# Altium PCB Power Board V2.PcbDoc
Units mil, origin at the board's own origin, x right, y up, seen from the top; angles counter-clockwise.
Board outline 2750 x 3800 mil, 2 copper layers (Top Layer, Bottom Layer); 56 components, 33 nets, 225 pads, 0 vias.
Unrouted connection lines stored in the file: 155.
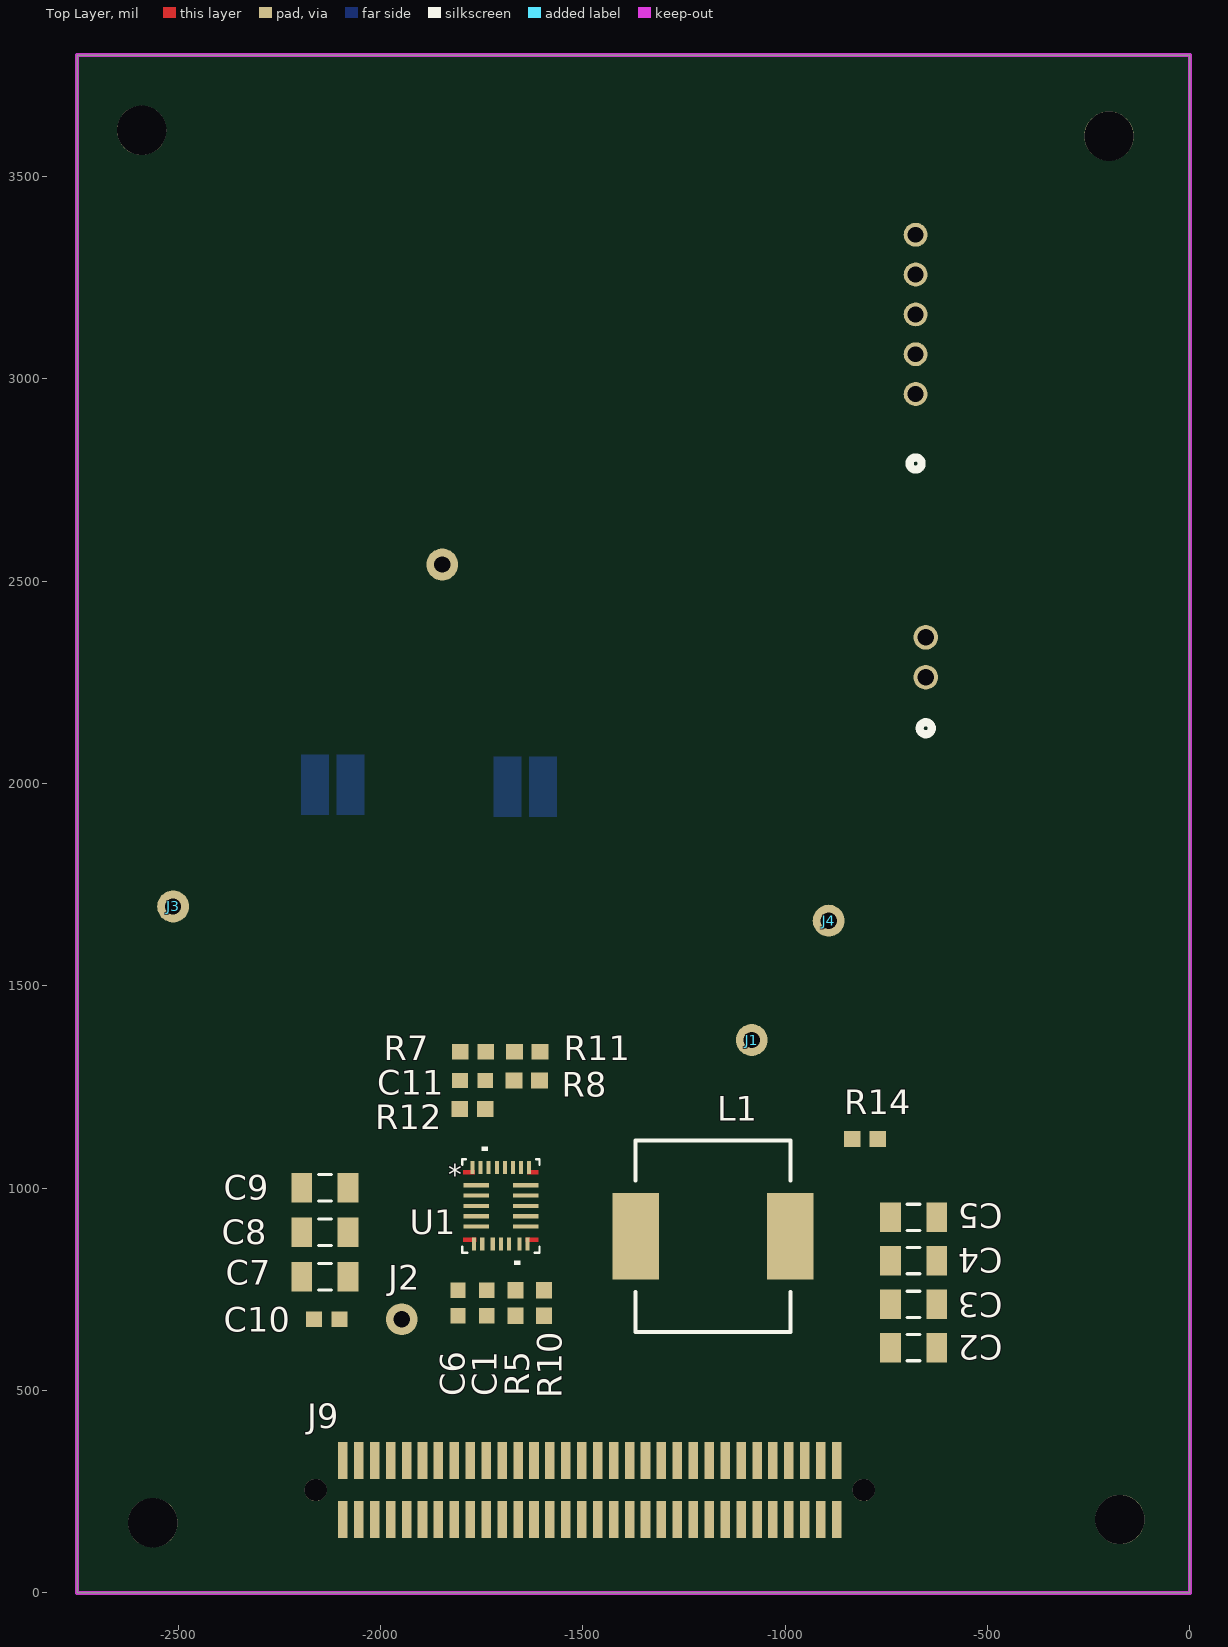
[diagram p0: Top Layer view]
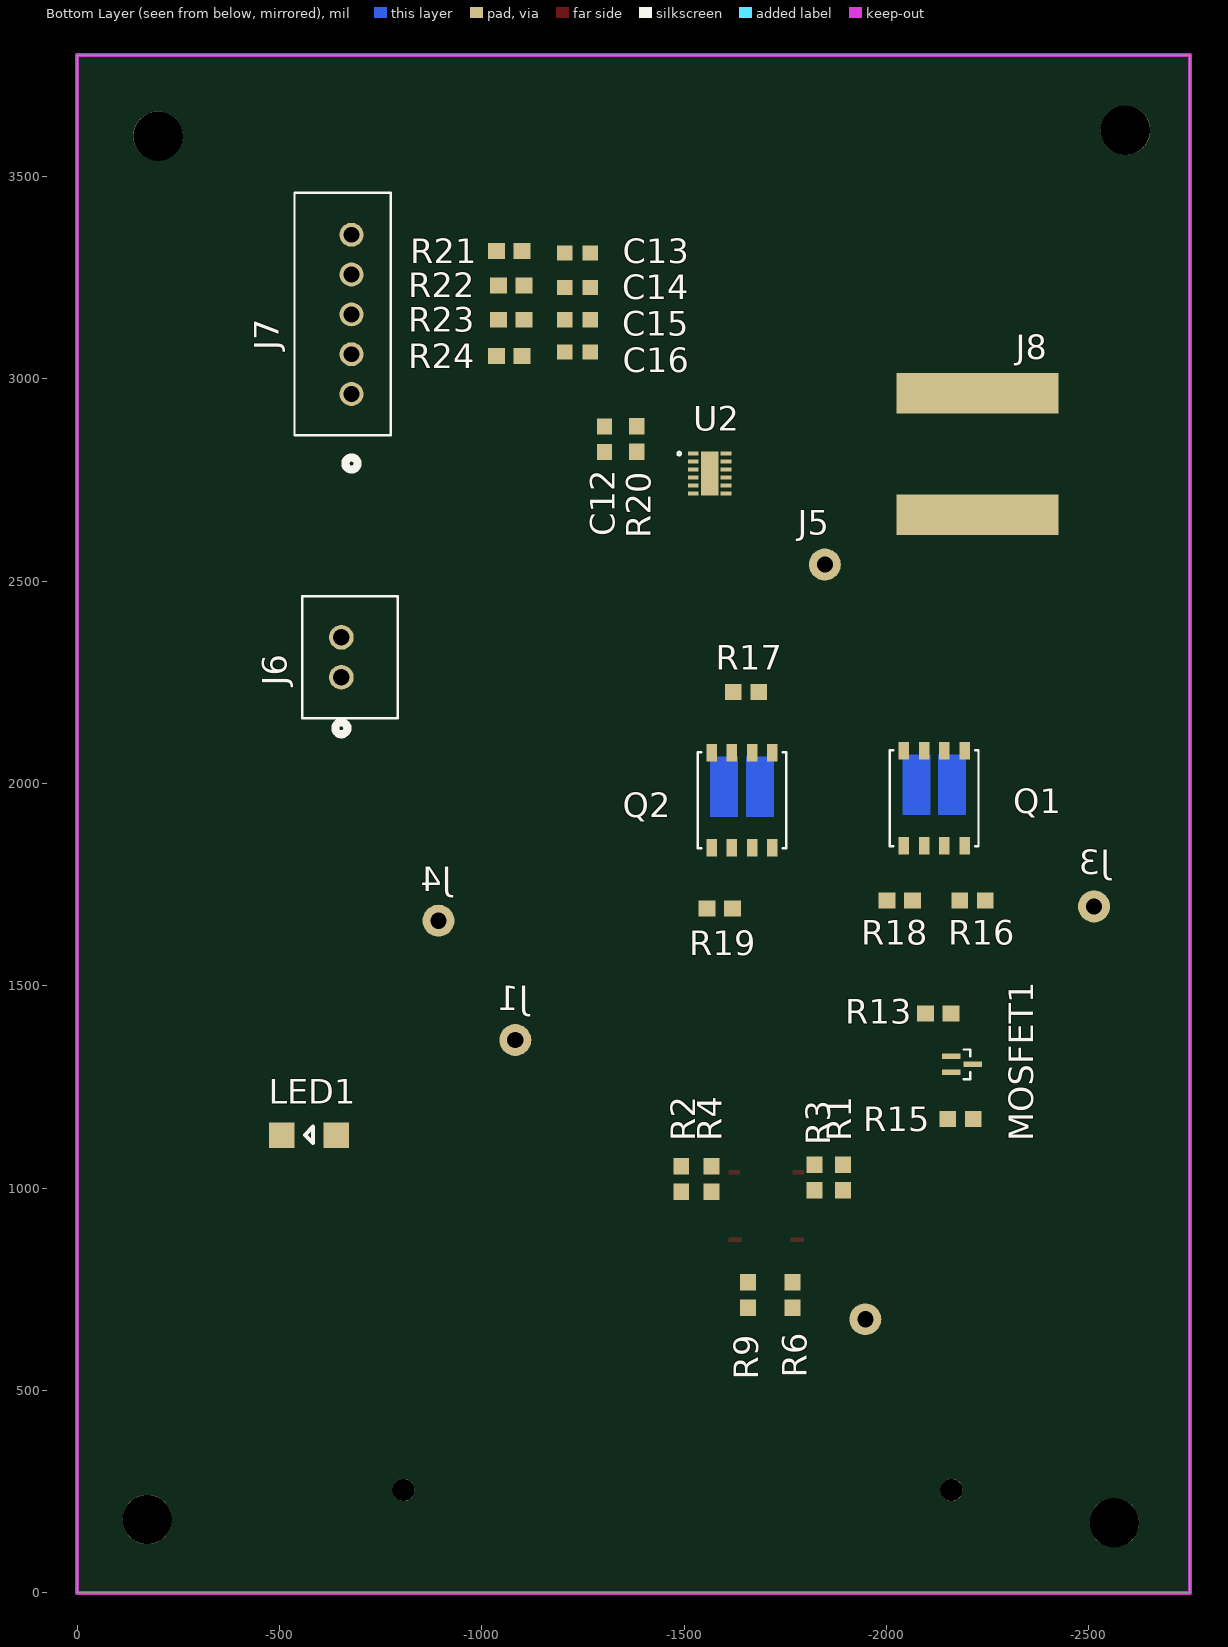
[diagram p1: Bottom Layer view, seen from below]

## Layer stack, top to bottom
Top Solder: solder mask 0.4, Solder Resist, Dk 3.5
Top Layer: signal copper 1.4
Dielectric 1: dielectric 12.6, FR-4, Dk 4.8
Bottom Layer: signal copper 1.4
Bottom Solder: solder mask 0.4, Solder Resist, Dk 3.5

## Board outline
-2750.02,-0.01 -2750.02,3799.99 -0.02,3799.99 -0.02,-0.01

## Design rules (kind name [scope] priority, off if disabled: settings)
Clearance [All] p1: gap=10 ignorepadtopadclearanceinfootprint=FALSE except(0: Arc-Hole Track-Hole SMDPad-Hole THPad-Hole Via-Hole Fill-Hole Poly-Hole Region-Hole Text-Hole)
PolygonConnect [All] p1: connectstyle=Relief reliefconductorwidth=10 reliefentries=4 polygonreliefangle="90 Angle" airgapwidth=10
RoutingVias [All] p1: holewidth=28 width=50 viastyle="Through Hole" minholewidth=28 minwidth=50 maxholewidth=28 maxwidth=50
SolderMaskExpansion [All] p1: expansion=4 istentingtop=FALSE
Width [All] p1: maxlimit=10 minlimit=10 preferedwidth=10
30 further rules are at their usual default settings.

## Classes and differential pairs
component class "Board Connector": J8 J9
component class "Buck Converter": C1 C2 C3 C4 C5 C6 C7 C8 C9 C10 C11 J1 J2 L1 LED1 MOSFET1 R1 R2 R3 R4 R5 R6 R7 R8 R9 R10 R11 R12 R13 R14 R15 U1
component class "Battery Management System": "  " C12 C13 C14 C15 C16 J3 J4 J5 J6 J7 Q1 Q2 R16 R17 R18 R19 R20 R21 R22 R23 R24 U2

## Components (designator, comment, footprint, x,y, rotation, side; value= is the part's Value field where it differs from the comment)
C1 "Cap" CAPC0603 -1737.96,716.2 r90 top value=0.22uF
C2 "Cap" CAPC1206 -682.96,606.2 r0 top value=33uF
C3 "Cap" CAPC1206 -682.96,712.66 r0 top value=33uF
C4 "Cap" CAPC1206 -682.96,821.2 r0 top value=NS
C5 "Cap" CAPC1206 -682.96,927.66 r0 top value=NS
C6 "Cap" CAPC0603 -1808.99,716.2 r270 top value=1uF
C7 "Cap" CAPC1206 -2137.96,781.2 r180 top value=22uF
C8 "Cap" CAPC1206 -2137.96,891.2 r180 top value=4.7uF
C9 "Cap" CAPC1206 -2137.96,1001.2 r180 top value=NS
C10 "Cap" CAPC0603 -2132.96,676.2 r180 top value=100nF
C11 "Cap" CAPC0603 -1772.96,1266.2 r0 top value=NS
C12 "Cap" CAPC0603 -1302.96,2851.2 r90 bottom value=100nF
C13 "Cap" CAPC0603 -1236.46,3311.2 r180 bottom value=100nF
C14 "Cap" CAPC0603 -1236.46,3226.2 r0 bottom value=100nF
C15 "Cap" CAPC0603 -1236.46,3146.2 r180 bottom value=100nF
C16 "Cap" CAPC0603 -1236.46,3066.2 r0 bottom value=100nF
J1 "5000 Test Point" "5000 Test Point" -1082.96,1366.2 r0 top
J2 "5000 Test Point" "5000 Test Point" -1947.96,676.2 r0 top
J3 "5000 Test Point" "5000 Test Point" -2512.96,1696.2 r0 top
J4 "5000 Test Point" "5000 Test Point" -892.96,1661.2 r0 top
J5 "5000 Test Point" "5000 Test Point" -1847.96,2541.2 r180 bottom
J6 "B2B-XH-A(LF)(SN)" CONN_B2B-XH-A(LF)(SN)_JST -652.96,2262.77 r270 bottom
J7 "B5B-XH-A(LF)(SN)" CONN_B5B-XH-A(LF)(SN)_JST -677.96,2962.49 r90 bottom
J8 "Surface Mount Pad to solder battery connector wires from power bus bar" "Battery Connector" -2207.96,2676.2 r0 bottom
J9 "0714392464" "1.0mm mezzanine connector 64 pin" -2093.51,326.86 r0 top
L1 "SRR1280A-6R8Y" "SRR1208 Series" -1369.85,881.2 r90 top
LED1 "LED" LED1206 -572.96,1131.2 r0 bottom
MOSFET1 "SSM3K56FS,LF" SSM_TOS -2186.38,1306.2 r270 bottom
Q1 "TSM6502CR RLG" PDFN56U_DUAL_TWS -2117.96,1963.7 r90 bottom
Q2 "TSM6502CR RLG" PDFN56U_DUAL_TWS -1642.96,1958.7 r90 bottom
R1 "Res" RES0603 -1892.96,1026.2 r90 bottom value=0
R2 "Res" RES0603 -1492.96,1022.69 r90 bottom value=NS
R3 "Res" RES0603 -1821.92,1026.2 r90 bottom value=NS
R4 "Res" RES0603 -1567.96,1022.69 r90 bottom value=0
R5 "Res" RES0603 -1666.92,716.2 r270 top value=0
R6 "Res" RES0603 -1767.96,736.2 r90 bottom value=NS
R7 "Res" RES0603 -1771.98,1337.23 r0 top value=0
R8 "Res" RES0603 -1638.93,1266.2 r0 top value=NS
R9 "Res" RES0603 -1657.96,736.2 r270 bottom value=NS
R10 "Res" RES0603 -1595.89,716.2 r90 top value=54.9k
R11 "Res" RES0603 -1637.96,1337.23 r0 top value=174k
R12 "Res" RES0603 -1772.96,1195.16 r0 top value=43.2k
R13 "Res" RES0603 -2127.96,1431.2 r180 bottom value=3k
R14 "Res" RES0603 -802.96,1121.2 r0 top value=1k
R15 "Res" RES0603 -2182.96,1171.2 r180 bottom value=NS
R16 "Res" RES0603 -2212.96,1711.2 r0 bottom value=1k
R17 "Res" RES0603 -1652.96,2226.2 r180 bottom value=1k
R18 "Res" RES0603 -2032.96,1711.2 r180 bottom value=1k
R19 "Res" RES0603 -1587.96,1691.2 r180 bottom value=1k
R20 "Res" RES0603 -1382.96,2851.2 r270 bottom value=300
R21 "Res" RES0603 -1067.96,3316.2 r180 bottom value=1k
R22 "Res" RES0603 -1072.96,3231.2 r180 bottom value=1k
R23 "Res" RES0603 -1072.96,3146.2 r180 bottom value=1k
R24 "Res" RES0603 -1067.96,3056.2 r180 bottom value=1k
U1 "MPQ4480GV-AEC1-P" QFN-25_4X5_MNP -1702.96,956.2 r0 top
U2 "BQ7720700DSSR" WSON12_DSS_TEX -1562.96,2766.2 r180 bottom

## Footprints (in the part's own frame and the unit in brackets; to place one, negate y for a bottom-side part, rotate by r counter-clockwise, add the part's x,y. Pads: shape width x height; smd on the part's side, far side on the other; paste and mask are expansions set on the pad)
"1.0mm mezzanine connector 64 pin" [mm]
  rect 0.6x2.3 smd: 1(0,0) 2(1,0) 3(2,0) 4(3,0) 5(4,0) 6(5,0) 7(6,0) 8(7,0) 9(8,0) 10(9,0) 11(10,0) 12(11,0) 13(12,0) 14(13,0) 15(14,0) 16(15,0) 17(16,0) 18(17,0) 19(18,0) 20(19,0) 21(20,0) 22(21,0) 23(22,0) 24(23,0) 25(24,0) 26(25,0) 27(26,0) 28(27,0) 29(28,0) 30(29,0) 31(30,0) 32(31,0) 33(0,-3.7) 34(1,-3.7) 35(2,-3.7) 36(3,-3.7) 37(4,-3.7) 38(5,-3.7) 39(6,-3.7) 40(7,-3.7) 41(8,-3.7) 42(9,-3.7) 43(10,-3.7) 44(11,-3.7) 45(12,-3.7) 46(13,-3.7) 47(14,-3.7) 48(15,-3.7) 49(16,-3.7) 50(17,-3.7) 51(18,-3.7) 52(19,-3.7) 53(20,-3.7) 54(21,-3.7) 55(22,-3.7) 56(23,-3.7) 57(24,-3.7) 58(25,-3.7) 59(26,-3.7) 60(27,-3.7) 61(28,-3.7) 62(29,-3.7) 63(30,-3.7) 64(31,-3.7)
  round 1.4 hole 1.4 unplated: H1(-1.7,-1.85) H2(32.7,-1.85)
"5000 Test Point" [mm]
  round 2 hole 1.02 unplated: 1(0,0)
"Battery Connector" [mil]
  rect 400x100 smd: 1(-17,12) 2(-17,-288)
CAPC0603 [mm] "Chip Capacitor, 2-Leads, Body 1.60x0.80mm, IPC Medium Density"
  rect 1x0.95 smd: 1(-0.8,0) 2(0.8,0)
  body extent -0.88,-0.48 0.87,0.48, height 0.8
CAPC1206 [mm] "Chip Capacitor, 2-Leads, Body 3.20x1.60mm, IPC Medium Density"
  rect 1.3x1.85 smd: 1(-1.45,0) 2(1.45,0)
  silkscreen extent -0.4,-0.82 0.4,0.82, body extent -1.7,-0.9 1.7,0.9, height 1.8
CONN_B2B-XH-A(LF)(SN)_JST [mil]
  round 61 hole 41 mask+0: 1(0,0) 2(-98.43,0)
  silkscreen extent -200,-97 141,139, body extent 0,0 10,10, height 10
CONN_B5B-XH-A(LF)(SN)_JST [mil]
  round 59 hole 39 mask+0: 1(0,0) 2(98.43,0) 3(196.85,0) 4(295.28,0) 5(393.7,0)
  silkscreen extent -187,-97 497,141, body extent 0,0 10,10, height 10
LED1206 [mm]
  rect 1.6x1.6 smd: A(-1.7,0) C(1.7,0)
  silkscreen extent -0.25,-0.53 0.26,0.5, body extent -1.6,-0.8 1.6,0.8, height 1.1
PDFN56U_DUAL_TWS [mil]
  rect 43x26 smd paste+0 mask+0: 1(-117.5,75) 2(-117.5,25) 3(-117.5,-25) 4(-117.5,-75) 5(117.5,-75) 6(117.5,-25) 7(117.5,25) 8(117.5,75)
  Top Layer region: 108,-10 108,-78 -41,-78 -41,-10
  Top Layer region: 108,10 108,78 -41,78 -41,10
  silkscreen extent -119,-110 119,110, body extent -127,-104 127,104, height 43
QFN-25_4X5_MNP [mil]
  rect 63x10 smd paste-5 mask+0: 1(-61,51) 2(-61,25.5) 3(-61,0) 4(-61,-25.5) 5(-61,-51) 13(61,-51) 14(61,-25.5) 15(61,0) 16(61,25.5) 17(61,51)
  rect 10x32 smd paste+0 mask+0: 6(-66,-94.5) 7(-46,-94.5) 8(-20,-94.5) 9(0,-94.5) 10(20,-94.5) 11(46,-94.5) 12(66,-94.5) 18(70,94.5) 19(50,94.5) 20(30,94.5) 21(10,94.5) 22(-10,94.5) 23(-30,94.5) 24(-50,94.5) 25(-70,94.5)
  Top Layer region: -65,88.5 -65,78.5 -92.5,78.5 -92.5,88.5
  Top Layer region: 65,88.5 65,78.5 92.5,78.5 92.5,88.5
  Top Layer region: 61,-88.5 61,-78.5 92.5,-78.5 92.5,-88.5
  Top Layer region: -61,-88.5 -61,-78.5 -92.5,-78.5 -92.5,-88.5
  silkscreen extent -96,-146 96,146, body extent -5,-5 5,5, height 10
RES0603 [mm] "Chip Resistor, 2-Leads, Body 1.60x0.80mm, IPC Medium Density"
  rect 1.05x1 smd: 1(-0.8,0) 2(0.8,0)
  body extent -0.88,-0.48 0.87,0.47, height 0.8
"SRR1208 Series" [mm] "SSR1208 Series Inductor from Bourns Inc"
  rect 5.4x2.9 smd: 1(0,0) 2(0,-9.7)
  silkscreen extent -6,-9.73 6,0
SSM_TOS [mm]
  rect 0.351x1.161 smd paste+0 mask+0: 1(-0.5,-0.675) 2(0.5,-0.675) 3(0,0.675)
  silkscreen extent -0.93,0.12 0.93,0.53, body extent -0.8,-0.9 0.8,0.9, height 0.8
WSON12_DSS_TEX [mil]
  rect 26x10 smd paste+0 mask+0: 1(-40.5,49.23) 2(-40.5,29.53) 3(-40.5,9.85) 4(-40.5,-9.85) 5(-40.5,-29.53) 6(-40.5,-49.23) 7(40.5,-49.23) 8(40.5,-29.53) 9(40.5,-9.85) 10(40.5,9.85) 11(40.5,29.53) 12(40.5,49.23)
  rect 43x108 smd paste+0 mask+0: 13(0,0)
  silkscreen extent -79,45 -71,53, body extent -41,-61 41,61, height 32

## Part data
C1 C2 C3 C4 C5 C6 C7 C8 C9 C10 C11 C12 C13 C14 C15 C16: Supplier Part Number 1=1276-1000-1-ND, ComponentLink1Description="New link", Supplier 1=Digi-Key
J6 J7: "No Description Available", Mfr_Name=JST, Copyright="Copyright (C) 2023 Ultra Librarian. All rights reserved.", RefDes=RefDes, Type=DEV
  J6: Manufacturer_Part_Number=B2B-XH-A(LF)(SN)
  J7: Manufacturer_Part_Number=B5B-XH-A(LF)(SN)
J8: library part "Battery Connector", "Battery connector from bus bar to board"
J9: "64 Position Connector Receptacle, Outer Shroud Contacts Surface Mount Gold"
L1: "FIXED IND 6.8UH 7.6A 18.5MOHM SM", Inductance=6.8uF, Manufacturer 1="Bourns Inc", Supplier Part Number 1=87X9503, Manufacturer Part Number 1=SRR1280A-6R8Y, Supplier 1=Newark
LED1: Color=Red, Supplier Part Number 1=1080-1419-1-ND, Supplier 1=Digi-Key
MOSFET1: "No Description Available", Mfr_Name="Toshiba Electronic Devices & Storage Corp.", Copyright="Copyright (C) 2023 Ultra Librarian. All rights reserved.", Manufacturer_Part_Number=SSM3K56FS,LF, RefDes=RefDes, Type=DEV
Q1 Q2: "No Description Available", Mfr_Name="Taiwan Semiconductor", Copyright="Copyright (C) 2023 Ultra Librarian. All rights reserved.", Manufacturer_Part_Number="TSM6502CR RLG", RefDes=RefDes, Type=DEV
R1 R2 R3 R4 R5 R6 R7 R8 R9 R10 R11 R12 R13 R14 R15 R16 R17 R18 R19 R20 R21 R22 R23 R24: Supplier Part Number 1=RMCF0603JT10K0CT-ND, Supplier 1=Digi-Key
U1: "No Description Available", Mfr_Name="Monolithic Power Systems", Copyright="Copyright (C) 2023 Ultra Librarian. All rights reserved.", Digi-Key_Part_Number_1=1589-MPQ4480GV-AEC1-PTR-ND, Digi-Key_Part_Number_2=1589-MPQ4480GV-AEC1-PCT-ND, Digi-Key_Part_Number_3=1589-MPQ4480GV-AEC1-PDKR-ND, Manufacturer_Part_Number=MPQ4480GV-AEC1-P, RefDes=RefDes, Type=DEV
U2: "No Description Available", Mfr_Name="Texas Instruments", Copyright="Copyright (C) 2023 Ultra Librarian. All rights reserved.", Manufacturer_Part_Number=BQ7720700DSSR, RefDes=RefDes, Type=DEV

## Free pads (board coordinates)
  round 122.05 hole 122.05 unplated: M1(-2590.55,3614.17) M1(-2562.99,173.23) M1(-200,3600) M1(-173.23,181.1)

## Nets (pads, with @x,y where several pads share a name; then routed paths per layer and width w, separated by ;. In a path a pad name is that pad's centre, name@x,y a point inside that pad or via, vN(x,y) a via of type N, cw(c..) or ccw(c..) an arc to the next point about the centre after c; other vN are vias at no path point)
5V: C2.1 C3.1 C4.1 C5.1 J1.1 J9.12 J9.13 J9.14 J9.15 J9.16 J9.17 J9.18 J9.19 J9.20 J9.21 J9.22 J9.23 J9.24 J9.25 J9.26 J9.27 J9.28 J9.29 J9.30 J9.31 J9.32 L1.2 R8.2 R11.2 R14.1
14.8V: C7.1 C8.1 C9.1 C10.1 J2.1 Q1.3 R6.1 R16.2 R20.1 U1.3 U1.15
"BATT +": J5.1 J8.1 Q2.5 Q2.6 R17.2
COUT: J4.1 Q2.2 R19.2 U2.10
DOUT: J3.1 Q1.2 R18.2 U2.11
GATE: MOSFET1.1 R13.2 U1.24
GND: C2.2 C3.2 C4.2 C5.2 C6.2 C7.2 C8.2 C9.2 C10.2 C12.2 C16.2 J6.1 J7.1 J8.2 J9.44 J9.45 J9.46 J9.47 J9.48 J9.49 J9.50 J9.51 J9.52 J9.53 J9.54 J9.55 J9.56 J9.57 J9.58 J9.59 J9.60 J9.61 J9.62 J9.63 J9.64 LED1.C MOSFET1.3 Q1.1 Q2.1 R3.2 R4.2 R9.2 R10.1 R12.2 R15.2 R18.1 R19.1 U1.1 U1.5 U1.6 U1.13 U1.17 U2.9
ILIM: R1.1 R3.1 U1.23
NetC1_1: C1.1 R5.2
NetC1_2: C1.2 L1.1 U1.4 U1.8 U1.9 U1.14
NetC11_1: C11.1 R7.2 R11.1 R12.1
NetC11_2: C11.2 R8.1
NetC12_1: C12.1 R20.2 U2.1
NetJ7_2: J7.2 R24.1
NetJ7_3: J7.3 R23.1
NetJ7_4: J7.4 R22.1
NetJ7_5: J7.5 R21.1
NetLED1_A: LED1.A R14.2
NetQ1_4: Q1.4 Q1.7 Q1.8 R16.1
NetQ1_5: Q1.5 Q1.6 Q2.3
NetQ2_4: Q2.4 Q2.7 Q2.8 R17.1
NetR5_1: R5.1 U1.10
NetR6_2: R6.2 R9.1 U1.11
NetR7_1: R7.1 U1.25
NetR10_2: R10.2 U1.12
RGND: MOSFET1.2 R15.1 U1.2 U1.16
TS: J6.2 U2.12
V1: C15.2 C16.1 R24.2 U2.8
V2: C14.2 C15.1 R23.2 U2.7
V3: C13.2 C14.1 R22.2 U2.6
V4: C13.1 R21.2 U2.2 U2.3 U2.4 U2.5
VCC_BUCK: C6.1 R1.2 R2.2 R13.1 U1.7
VDROP: R2.1 R4.1 U1.22
pads on no net: J9.1 J9.2 J9.3 J9.4 J9.5 J9.6 J9.7 J9.8 J9.9 J9.10 J9.11 J9.33 J9.34 J9.35 J9.36 J9.37 J9.38 J9.39 J9.40 J9.41 J9.42 J9.43 J9.H1 J9.H2 U1.18 U1.19 U1.20 U1.21 U2.13

## Keep-outs
Keep-Out Layer:
  the board outline again, w10

## Text inside footprints (layer, text, board x,y; h text height)
U1: Top Overlay "*" at -1832.96,1009.95 h50; Mechanical 13 "*" at -1734.96,994.95 h50